# EAGLE board MicroMouse_Schematics_Final (EAGLE 8.6.0)
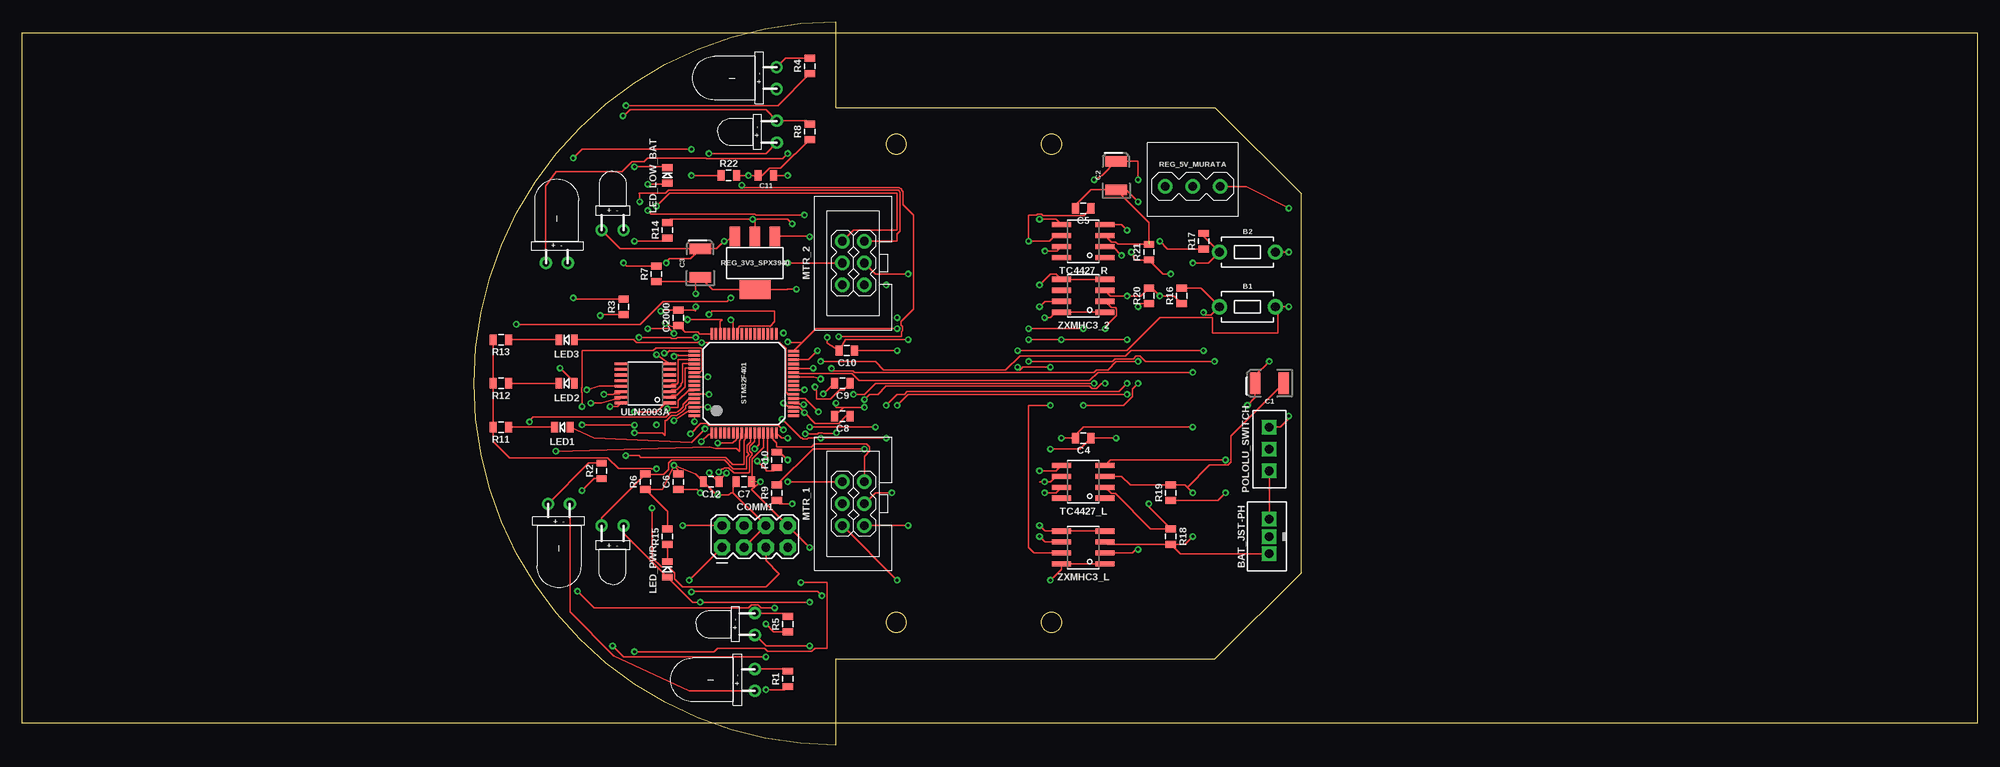
[diagram p0: board, top side]
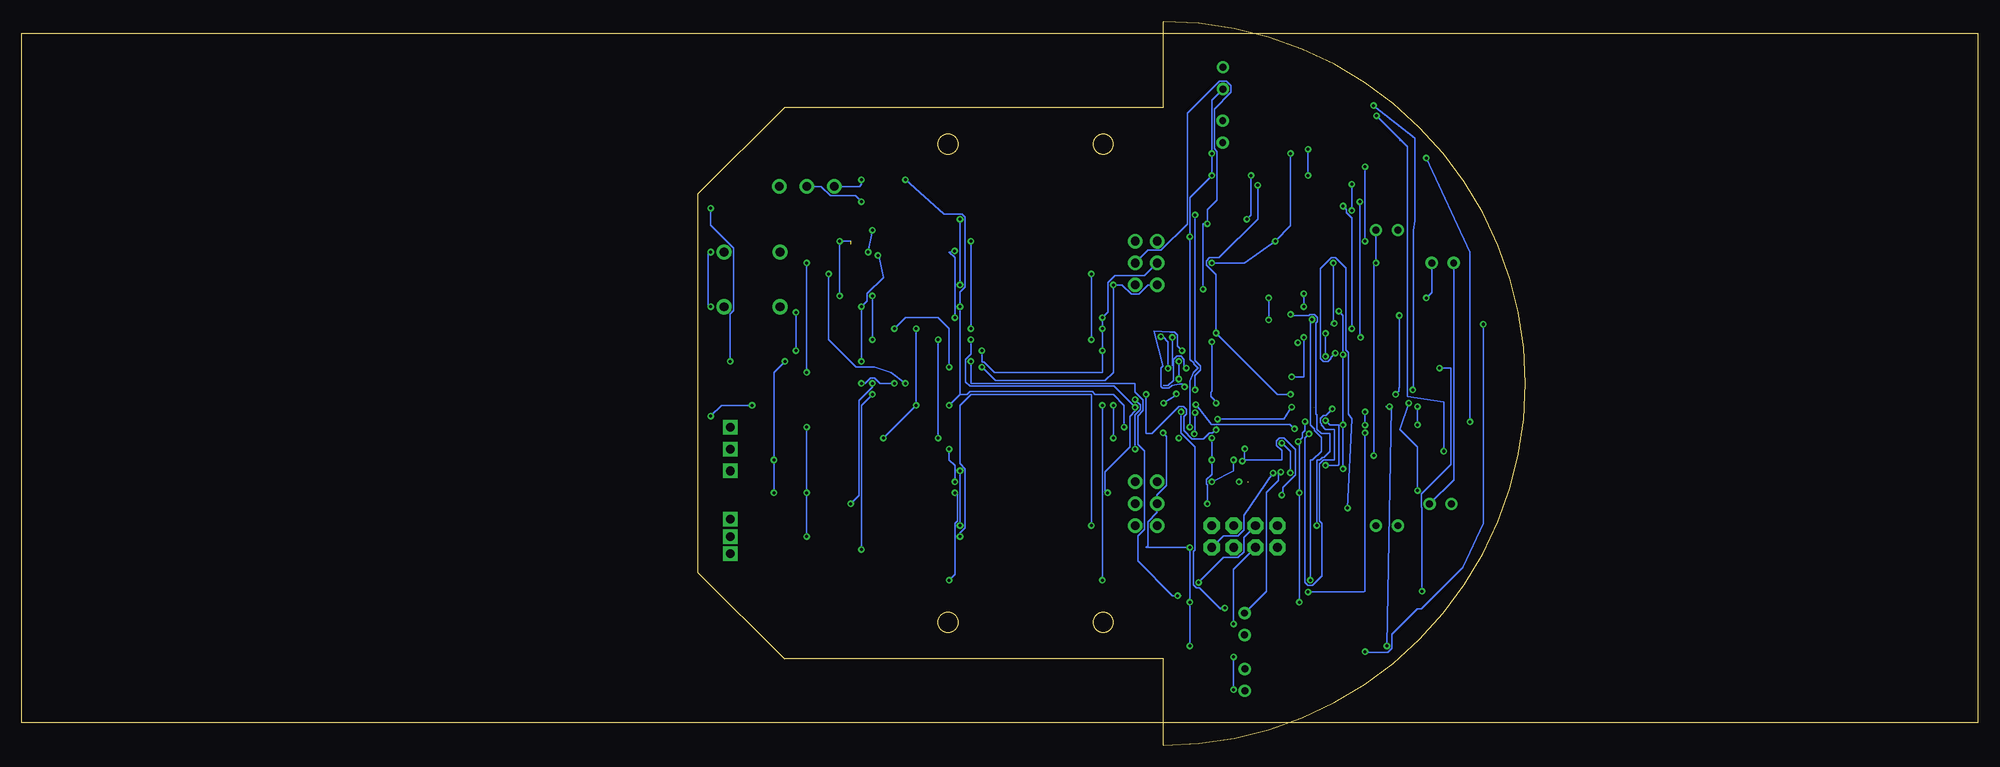
[diagram p1: board, bottom side, seen from below]

Size 227 x 80 mm. Coordinates in mm from the lower left corner, seen from the top.
Outline: 0,0 227,0 227,80 0,80 0,0
Copper layers (1*16): Top 0.035mm / dielectric 1.5mm / Bottom 0.035mm
Design rules "default": minimum track width 6mil, minimum drill 0.35mm, track to track 6mil, track to pad 6mil, pad to pad 6mil, via to via 6mil, smd to smd 6mil, copper to edge 40mil, drill to drill 6mil, minimum pad ring 10mil, minimum via ring 8mil, stop-mask expansion 4mil, vias tented up to drill 0mil, thermal gap 10mil

## Footprints (pad centres in the part's own frame; a part is rotated, then mirrored left to right if it is on the bottom)
POLOLU_BUTTON = drill 1 pad 1.778: P$1 -3.25,0; P$2 3.25,0
B3B-PH-K-S = drill 1 pad 1.676 square: BAT_+ 2,0; BAT_- -2,0; NC 0,0
EIA3528 = smd 1.2 x 2.5: A 1.65,0; C -1.65,0
0805 = smd 0.8 x 1.2: 1 -0.9,0; 2 0.9,0
2X4 = drill 1.016 pad 1.88 octagon: 1 -3.81,-1.27; 2 -3.81,1.27; 3 -1.27,-1.27; 4 -1.27,1.27; 5 1.27,-1.27; 6 1.27,1.27; 7 3.81,-1.27; 8 3.81,1.27
EMITTER = drill 0.8 pad 1.422: EM_+ -1.397,0.016; EM_- 1.143,0.016
LED-0805 = smd 0.8 x 1.2: A -0.9,0; C 0.9,0
MOTOR_ENCODER_HEADER = drill 1 pad 1.676: ENC_A 2.54,1.27; ENC_B 2.54,-1.27; ENC_GND 0,-1.27; ENC_VDD 0,1.27; MTR+ -2.54,1.27; MTR_- -2.54,-1.27
POLOLU_SWITCH = drill 1 pad 1.676 square: PIN1 -2.54,0; PIN2 0,0; PIN3 2.54,0
RECEIVER = drill 0.8 pad 1.422: RE_+ -1.27,0; RE_- 1.27,0
SOT223 = smd 1.219 x 2.235: GND 0,-3.099; IN -2.311,-3.099; OUT 2.311,-3.099 | smd 3.6 x 2.2: GND2 0,3.099
5V_REG_MURATA = drill 1 pad 1.676: GND 0,0; IN -3.175,0; OUT 3.175,0
LQFP64 = smd 0.3 x 1.3: BOOT0 -1.75,5.75; PA3 -3.75,-5.75; PA4 -2.25,-5.75; PA5 -1.75,-5.75; PA6 -1.25,-5.75; PA7 -0.75,-5.75; PA14 3.75,5.75; PA15 3.25,5.75; PB0 0.75,-5.75; PB1 1.25,-5.75; PB2 1.75,-5.75; PB3 0.75,5.75; PB4 0.25,5.75; PB5 -0.25,5.75; PB6 -0.75,5.75; PB7 -1.25,5.75; PB8 -2.25,5.75; PB9 -2.75,5.75; PB10 2.25,-5.75; PC4 -0.25,-5.75; PC5 0.25,-5.75; PC10 2.75,5.75; PC11 2.25,5.75; PC12 1.75,5.75; PD2 1.25,5.75; VCAP_1 2.75,-5.75; VDD_0 -2.75,-5.75; VDD_1 3.75,-5.75; VDD_3 -3.75,5.75; VSS_0 -3.25,-5.75; VSS_1 -3.25,5.75; VSS_2 3.25,-5.75 | smd 1.3 x 0.3: NRST -5.75,0.75; PA0_WKUP -5.75,-2.75; PA1 -5.75,-3.25; PA2 -5.75,-3.75; PA8 5.75,0.25; PA9 5.75,0.75; PA10 5.75,1.25; PA11 5.75,1.75; PA12 5.75,2.25; PA13 5.75,2.75; PB12 5.75,-3.75; PB13 5.75,-3.25; PB14 5.75,-2.75; PB15 5.75,-2.25; PC0 -5.75,0.25; PC1 -5.75,-0.25; PC2 -5.75,-0.75; PC3 -5.75,-1.25; PC6 5.75,-1.75; PC7 5.75,-1.25; PC8 5.75,-0.75; PC9 5.75,-0.25; PC13 -5.75,3.25; PC14 -5.75,2.75; PC15 -5.75,2.25; PH0 -5.75,1.75; PH1 -5.75,1.25; VBAT -5.75,3.75; VDD_2 5.75,3.75; VDDA -5.75,-2.25; VSS_3 5.75,3.25; VSSA -5.75,-1.75
TC4427_SOIC8 = smd 0.61 x 2.21: GND 0.635,-2.54; IN_A -0.635,-2.54; IN_B 1.905,-2.54; NC1 -1.905,-2.54; NC2 -1.905,2.54; OUT_A -0.635,2.54; OUT_B 1.905,2.54; VDD 0.635,2.54
ULN2003A = smd 1.55 x 0.3: 1B -2.8,2.275; 1C 2.8,2.275; 2B -2.8,1.625; 2C 2.8,1.625; 3B -2.8,0.975; 3C 2.8,0.975; 4B -2.8,0.325; 4C 2.8,0.325; 5B -2.8,-0.325; 5C 2.8,-0.325; 6B -2.8,-0.975; 6C 2.8,-0.975; 7B -2.8,-1.625; 7C 2.8,-1.625; COM 2.8,-2.275; GND -2.8,-2.275
ZXMHC3 = smd 0.61 x 2.21: N1D/P1D -0.635,-2.54; N1G -1.905,-2.54; N1S/N2S 0.635,-2.54; N2D/P2D 0.635,2.54; N2G 1.905,-2.54; P1G -1.905,2.54; P1S/P2S -0.635,2.54; P2G 1.905,2.54

## Placement (x,y rotation side)
B1  POLOLU_BUTTON  [POLOLU_BUTTON]  142.24,48.26 0 top
B2  POLOLU_BUTTON  [POLOLU_BUTTON]  142.24,54.61 0 top
BAT_JST-PH  3PIN  [B3B-PH-K-S]  144.78,21.59 90 top
C1  47uF  [EIA3528]  144.78,39.37 180 top
C2  47uF  [EIA3528]  127,63.5 90 top
C3  47uF  [EIA3528]  78.74,53.34 90 top
C4  1.0uF  [0805]  123.19,33.02 180 top
C5  1.0uF  [0805]  123.19,59.69 180 top
C6  0.1uF  [0805]  76.2,27.94 90 top
C7  0.1uF  [0805]  83.82,27.94 180 top
C8  0.1uF  [0805]  95.25,35.56 180 top
C9  2.2uF  [0805]  95.25,39.37 180 top
C10  0.1uF  [0805]  95.76,43.18 180 top
C11  10uF  [0805]  86.36,63.5 180 top
C12  0.1uF  [0805]  80.01,27.94 180 top
C2000  0.1uF  [0805]  76.2,46.99 90 top
COMM1  M04X2  [2X4]  85.09,21.59 0 top
E$1  [MOUSE_OUTLINE_2WHEEL]  110.49,39.37 90 top
EM_1  SFH4545  [EMITTER]  85.09,5.08 90 top
EM_2  SFH4545  [EMITTER]  62.23,25.4 180 top
EM_3  SFH4545  [EMITTER]  62.23,53.34 0 top
EM_4  SFH4545  [EMITTER]  87.63,74.93 90 top
LED1  LED  [LED-0805]  62.74,34.29 180 top
LED2  LED  [LED-0805]  63.25,39.37 180 top
LED3  LED  [LED-0805]  63.25,44.45 180 top
LED_LOW_BAT  LED  [LED-0805]  74.93,63.5 90 top
LED_PWR  LED  [LED-0805]  74.93,17.78 90 top
MTR_1  MOTOR_ENCODER_HEADER  [MOTOR_ENCODER_HEADER]  96.52,25.4 90 top
MTR_2  MOTOR_ENCODER_HEADER  [MOTOR_ENCODER_HEADER]  96.52,53.34 90 top
POLOLU_SWITCH  POLOLU_SWITCH  [POLOLU_SWITCH]  144.78,31.75 90 top
R1  16K  [0805]  88.9,5.08 90 top
R2  16K  [0805]  67.31,29.21 90 top
R3  16K  [0805]  69.85,48.26 90 top
R4  16K  [0805]  91.44,76.2 90 top
R5  1.8K  [0805]  88.9,11.43 90 top
R6  1.8K  [0805]  72.39,27.94 90 top
R7  1.8K  [0805]  73.66,52.07 90 top
R8  1.8K  [0805]  91.44,68.58 90 top
R9  30K  [0805]  87.63,26.67 90 top
R10  10K  [0805]  87.63,30.48 90 top
R11  1K  [0805]  55.63,34.29 180 top
R12  1K  [0805]  55.63,39.37 180 top
R13  1K  [0805]  55.63,44.45 180 top
R14  1K  [0805]  74.93,57.15 90 top
R15  1K  [0805]  74.93,21.59 90 top
R16  47K  [0805]  134.62,49.53 90 top
R17  47K  [0805]  137.16,55.88 90 top
R18  47K  [0805]  133.35,21.59 270 top
R19  47K  [0805]  133.35,26.67 90 top
R20  47K  [0805]  130.81,49.53 90 top
R21  47K  [0805]  130.81,54.61 90 top
R22  47K  [0805]  82.04,63.5 0 top
RE_LD  TEFT4300  [RECEIVER]  68.58,22.86 180 top
RE_LF  TEFT4300  [RECEIVER]  85.09,11.43 90 top
RE_RD  TEFT4300  [RECEIVER]  68.58,57.15 0 top
RE_RF  TEFT4300  [RECEIVER]  87.63,68.58 90 top
REG_3V3_SPX3940  3V3_REG  [SOT223]  85.09,53.34 180 top
REG_5V_MURATA  REG_5V_MURATA  [5V_REG_MURATA]  135.89,62.23 180 top
STM32F401  STM32F4_401_410_411_412_413_446  [LQFP64]  83.82,39.37 90 top
TC4427_L  TC4427_SOIC8  [TC4427_SOIC8]  123.19,27.94 90 top
TC4427_R  TC4427_SOIC8  [TC4427_SOIC8]  123.19,55.88 90 top
ULN2003A  ULN2003A  [ULN2003A]  72.39,39.37 180 top
ZXMHC3_2  ZXMHC3  [ZXMHC3]  123.19,49.53 90 top
ZXMHC3_L  ZXMHC3  [ZXMHC3]  123.19,20.32 90 top

## Library data of the parts
B1 B2 = POLOLU_BUTTON
BAT_JST-PH = BATT_JST-PH_3PIN
C1-C3 = SparkFun-Capacitors; PROD_ID: CAP-08310
C4-C10 C12 C2000 = CAP_CERAMIC_0805IN_2012MM
C11 = SparkFun-Capacitors; PROD_ID: CAP-11330
COMM1 = 2X4_PIN_HEADER
E$1 = MOUSE_OUTLINE_2WHEEL
EM_1-EM_4 = SFH4545
LED1-LED3 LED_LOW_BAT LED_PWR = LED_0805
MTR_1 MTR_2 = MOTOR_ENCODER_HEADER
POLOLU_SWITCH = POLOLU_SWITCH
R1-R22 = RESISTOR_0805IN_2012MM
RE_LD RE_LF RE_RD RE_RF = TEFT4300
REG_3V3_SPX3940 = REG_3V3_LM3940
REG_5V_MURATA = REG_5V_MURATA
STM32F401 = STM32F4_401_410_411_412_413_446
TC4427_L TC4427_R = TC4427
ULN2003A = ULN2003A
ZXMHC3_2 ZXMHC3_L = ZXMHC3

## Nets
+3V3: B1.P$2 B2.P$2 C3.A C6.1 C7.1 C8.1 C10.1 C2000.1 COMM1.8 LED_PWR.A MTR_1.ENC_VDD MTR_2.ENC_VDD RE_LD.RE_+ RE_LF.RE_+ RE_RD.RE_+ RE_RF.RE_+ REG_3V3_SPX3940.OUT STM32F401.VBAT STM32F401.VDD_0 STM32F401.VDD_1 STM32F401.VDD_2 STM32F401.VDD_3 STM32F401.VDDA
+5V: C2.A C11.1 EM_1.EM_+ EM_2.EM_+ EM_3.EM_+ EM_4.EM_+ REG_3V3_SPX3940.IN REG_5V_MURATA.OUT ZXMHC3_2.P1S/P2S ZXMHC3_L.P1S/P2S
B0: B1.P$1 R16.2 STM32F401.PB0
B1: B2.P$1 R17.2 STM32F401.PB1
EM_LD: STM32F401.PC12 ULN2003A.2B
EM_LF: STM32F401.PD2 ULN2003A.1B
EM_RD: STM32F401.PC11 ULN2003A.3B
EM_RF: STM32F401.PC10 ULN2003A.4B
GND: BAT_JST-PH.BAT_- C1.C C2.C C4.2 C5.2 C8.2 C9.2 MTR_1.ENC_GND R16.1 R17.1 R18.2 R19.2 R20.2 R21.2 REG_5V_MURATA.GND TC4427_L.GND TC4427_R.GND ZXMHC3_2.N1S/N2S ZXMHC3_L.N1S/N2S
LED1: LED1.A STM32F401.PA4
LED2: LED2.A STM32F401.PA5
LED3: LED3.A STM32F401.PA6
LED_LOW_BAT: LED_LOW_BAT.A STM32F401.PA7
LENC_A: MTR_1.ENC_A STM32F401.PA0_WKUP
LENC_B: MTR_1.ENC_B STM32F401.PA1
LMTR+: MTR_1.MTR+ ZXMHC3_L.N1D/P1D
LMTR-: MTR_1.MTR_- ZXMHC3_L.N2D/P2D
LPWM_A: R18.1 STM32F401.PB9 TC4427_L.IN_A
LPWM_B: R19.1 STM32F401.PB8 TC4427_L.IN_B
N$1: BAT_JST-PH.BAT_+ POLOLU_SWITCH.PIN1
N$3: C1.A POLOLU_SWITCH.PIN3 REG_5V_MURATA.IN
N$4: LED1.C R11.1
N$5: LED2.C R12.1
N$6: LED3.C R13.1
N$7: R1.1 ULN2003A.1C
N$8: LED_LOW_BAT.C R14.1
N$9: R2.1 ULN2003A.2C
N$10: LED_PWR.C R15.1
N$11: R3.1 ULN2003A.3C
N$12: TC4427_L.OUT_A ZXMHC3_L.N1G ZXMHC3_L.P1G
N$13: R4.1 ULN2003A.4C
N$14: EM_1.EM_- R1.2
N$15: TC4427_L.OUT_B ZXMHC3_L.N2G ZXMHC3_L.P2G
N$16: EM_2.EM_- R2.2
N$17: EM_3.EM_- R3.2
N$18: EM_4.EM_- R4.2
N$21: TC4427_R.OUT_A ZXMHC3_2.N1G ZXMHC3_2.P1G
N$25: TC4427_R.OUT_B ZXMHC3_2.N2G ZXMHC3_2.P2G
N$28: C9.1 STM32F401.VCAP_1
N$32: R22.1 STM32F401.BOOT0
NRST: C12.1 COMM1.7 STM32F401.NRST
RE_LD: R6.2 RE_LD.RE_- STM32F401.PC2
RE_LF: R5.2 RE_LF.RE_- STM32F401.PC3
RE_RD: R7.2 RE_RD.RE_- STM32F401.PC1
RE_RF: R8.2 RE_RF.RE_- STM32F401.PC0
RENC_A: MTR_2.ENC_A STM32F401.PA15
RENC_B: MTR_2.ENC_B STM32F401.PB3
RMRT-: ZXMHC3_2.N2D/P2D
RMTR+: MTR_2.MTR+ ZXMHC3_2.N1D/P1D
RMTR-: MTR_2.MTR_-
RPWM_A: R20.1 STM32F401.PB7 TC4427_R.IN_A
RPWM_B: R21.1 STM32F401.PB6 TC4427_R.IN_B
RX: COMM1.4 STM32F401.PA10
S$1: C3.C C6.2 C7.2 C10.2 C11.2 C12.2 C2000.2 COMM1.3 COMM1.6 MTR_2.ENC_GND R5.1 R6.1 R7.1 R8.1 R10.1 R11.2 R12.2 R13.2 R14.2 R15.2 R22.2 REG_3V3_SPX3940.GND REG_3V3_SPX3940.GND2 STM32F401.PB2 STM32F401.VSS_1 STM32F401.VSSA ULN2003A.GND
SWCLK: COMM1.5 STM32F401.PA14
SWDIO: COMM1.1 STM32F401.PA13
TX: COMM1.2 STM32F401.PA9
VBAT: C4.1 C5.1 R9.2 TC4427_L.VDD TC4427_R.VDD
VCAP_1: STM32F401.VSS_2
VCAP_2: STM32F401.VSS_3
VOLTMETER: R9.1 R10.2 STM32F401.PA2
VSS_0: STM32F401.VSS_0

## Tracks (layer width: path | path; a pad name or v marks a point on that pad's centre or on a via)
+3V3  (via drill 0.35)  (1 unrouted)
  Top 0.152: 147.33,48.26 v147.03,48.26 B1.P$2 145.8,47.95 145.8,45.21 138.18,45.21 138.18,46.99 132.08,46.99 128.27,43.18 v115.57,43.18 | v147.03,54.61 B2.P$2 | v90.84,35.98 92.08,34.73 94.84,34.73 95.67,35.56 C8.1 | v90.84,35.98 90.31,36.5 89.69,36.5 STM32F401.VDD_0 89.45,36.74 88.83,36.74 88.69,36.88 88.69,37.08 v88.39,37.08 | v91.44,20.32 COMM1.8 84.72,27.04 v85.74,27.94 84.76,27.98 84.76,30.61 86.07,31.91 STM32F401.VDDA | v91.44,8.89 86.36,8.89 RE_LF.RE_+ | v91.44,13.97 v78.74,13.97 77.84,13.97 LED_PWR.A 69.85,21.96 RE_LD.RE_+ | v78.74,26.67 78.37,27.04 C6.1 | C3.A 69.47,54.99 RE_RD.RE_+ | REG_3V3_SPX3940.OUT 82.55,56.21 v81.53,55.88 80.64,54.99 C3.A | MTR_2.ENC_VDD v88.9,53.34 | v78.07,34.93 STM32F401.VDD_3 | STM32F401.VBAT 79.89,33.46 79.73,33.46 v78.87,32.6 | v101.6,45.72 92.17,45.72 90.53,44.09 | 90.53,44.09 STM32F401.VDD_1 | v90.84,35.98 v90.83,35.98 | v90.92,33.52 92.35,33.52 92.46,33.63 92.96,33.63 93.06,33.53 94.44,33.53 v94.54,33.63 | RE_RF.RE_+ 86.36,66.04 v79.76,66.04 | STM32F401.VDD_2 78.67,45.12 78.48,45.31 76.98,45.31 76.39,45.91 | 76.39,45.91 C2000.1 | C3.A 77.6,53.85 75.18,53.85 74.79,53.45 v74.79,53.34 | v74.68,46.33 75.61,45.91 76.39,45.91 | C10.1 v101.6,43.18 | 90.53,44.09 89.01,44.09 v88.9,44.2
  Bottom 0.152: v147.03,48.26 147.32,48.55 147.32,54.61 v147.03,54.61 | v115.57,43.18 115.57,41.91 115.51,41.85 115.32,41.85 114.11,40.64 101.6,40.64 v101.6,43.18 v101.6,45.72 v101.6,46.99 100.94,47.65 100.94,51.05 100.12,51.87 96.72,51.87 MTR_2.ENC_VDD | v91.44,8.89 v91.44,13.97 v91.44,20.32 96.52,20.32 96.32,20.52 96.32,23.3 95.25,24.37 MTR_1.ENC_VDD 95.25,26.43 94.18,27.5 94.18,33.22 94.54,33.58 v94.54,33.63 | v78.74,13.97 v78.74,26.67 78.74,32.51 78.78,32.51 v78.87,32.6 78.38,33.1 78.38,33.62 78.07,33.93 v78.07,34.93 78.07,34.96 | v88.9,53.34 85.09,53.34 v81.53,55.88 79.76,57.66 v79.76,66.04 | v90.83,35.98 90.83,33.63 90.93,33.53 v90.92,33.52 | v74.79,53.34 74.79,46.34 74.68,46.23 75.08,46.23 v74.68,46.33 | v88.39,37.08 88.39,37.24 89,37.85 89,38.35 88.9,38.45 v88.9,44.2
+5V  (via drill 0.35)
  Top 0.152: ZXMHC3_L.P1S/P2S 117.47,19.68 116.84,20.32 116.84,36.83 v119.38,36.83 | v118.11,48.26 118.75,48.9 ZXMHC3_2.P1S/P2S | v124.46,62.99 125.35,63.5 C2.A 129.54,65.15 v129.54,62.99 | v99.06,34.29 v91.44,34.29 | EM_1.EM_+ 77.44,3.68 68.68,7.77 63.63,12.82 EM_2.EM_+ | v88.9,63.5 C11.1 | v91.44,56.39 91.39,56.44 REG_3V3_SPX3940.IN | EM_3.EM_+ 60.83,62.24 62.04,63.96 69.71,63.96 70.87,65.12 72.23,65.12 72.64,65.53 79.41,65.53 79.5,65.43 88.29,65.43 v88.9,66.04
  Bottom 0.152: 118.11,38.1 v119.38,36.83 | 118.11,38.1 v118.11,48.26 118.11,49.94 117.5,50.55 117.5,58.67 117.86,59.03 119.99,59.03 v124.46,62.99 | 118.11,38.1 117.27,38.1 116.97,38.41 102.74,38.41 102.44,38.1 100.33,38.1 99.06,36.83 v99.06,34.29 | EM_4.EM_+ 88.9,72.25 v88.9,66.04 v88.9,63.5 91.44,60.96 v91.44,56.39 91.44,42.16 90.99,41.71 90.99,41.6 90.53,41.15 91.04,40.64 91.44,39.62 v91.44,34.29 | EM_2.EM_+ 60.83,28.18 EM_3.EM_+ | REG_5V_MURATA.OUT 129.79,62.23 129.54,62.48 v129.54,62.99
B0  (via drill 0.35)
  Top 0.152: R16.2 136.82,50.43 B1.P$1 138.03,47.3 137.16,47.3 v137.16,47.6 | v137.16,43.18 128.7,43.18 128.09,42.57 115.82,42.57 114.19,40.95 100.03,40.95 99.06,41.91 v92.71,41.91 | v92.71,39.88 91.96,40.12 STM32F401.PB0
  Bottom 0.152: v137.16,47.6 v137.16,43.18 | v92.71,41.91 v92.71,39.88
B1  (via drill 0.35)
  Top 0.152: R17.2 137.16,56.44 B2.P$1 137.72,53.34 v135.89,53.34 | v135.89,40.64 124.87,40.64 123.91,39.67 97.17,39.67 96.34,40.5 89.69,40.5 STM32F401.PB1
  Bottom 0.152: v135.89,53.34 v135.89,40.64
EM_LD
  Top 0.152: ULN2003A.2B 75.46,38.02 76.06,38.02 77.01,38.97 77.01,41.15 78.04,41.15 STM32F401.PC12
EM_LF  (via drill 0.35)
  Top 0.152: STM32F401.PD2 78.74,40.62 78.74,40.67 78.95,40.88 78.95,43.37 78.81,43.5 74.68,43.5 73.61,43.5 73.3,43.18 65.02,43.18 65.02,38.91 64.98,38.86 64.98,38.36 65.02,38.31 v65.02,36.67 | ULN2003A.1B 75.12,37.02 74.66,37.02 73.7,36.07 v71.12,36.07 | v71.12,34.54 v65.03,34.54 v65.02,34.54
  Bottom 0.152: v71.12,36.07 v71.12,34.54 | v65.02,34.54 v65.02,36.67
EM_RD
  Top 0.152: STM32F401.PC11 78.03,41.66 76.71,41.66 76.71,39.53 76.5,39.32 76.5,39.1 76.06,38.67 75.46,38.67 ULN2003A.3B
EM_RF
  Top 0.152: ULN2003A.4B 75.46,39.32 76.06,39.32 76.19,39.45 76.19,42.16 76.2,42.16 76.24,42.12 STM32F401.PC10
GND  (via drill 0.35)  (1 unrouted)
  Top 0.152: ZXMHC3_L.N1S/N2S 126,20.69 R18.2 | R18.2 134.45,19.59 BAT_JST-PH.BAT_- | 135.25,27.3 134.99,27.57 R19.2 128.64,27.57 127.64,28.57 TC4427_L.GND | 135.25,27.3 v135.89,26.67 | v135.89,21.59 134.99,20.69 R18.2 | 135.25,27.3 137.82,29.87 139.95,29.87 140.31,30.23 140.31,33.25 C1.C | C4.2 121.92,33.02 | 121.92,33.02 v120.65,33.02 | v128.27,44.45 v120.65,44.45 v116.84,44.45 | ZXMHC3_2.N1S/N2S 126.36,49.53 v128.27,49.53 129.91,49.53 R20.2 131.18,50.43 v132.08,49.53 133.72,49.53 R16.1 | v132.08,55.88 132.98,54.98 R17.1 | C2.C 124.08,61.85 121.92,59.69 C5.2 | v135.89,34.29 123.19,34.29 121.92,33.02 | TC4427_R.GND 126.47,55.78 126.93,55.78 127.2,55.51 R21.2 130.81,58.04 C2.C | v97.79,36.58 95.37,36.58 | 95.37,36.58 C8.2 | v100.99,26.67 99.06,26.67 MTR_1.ENC_GND | v93.02,38.16 C9.2 | 95.37,36.58 94.5,36.58 v94.49,37.08 | v129.54,60.45 128.14,61.85 C2.C
  Bottom 0.152: v135.89,21.59 v135.89,26.67 v135.89,34.29 | v120.65,33.02 v120.65,44.45 | v128.27,44.45 v128.27,49.53 | v132.08,49.53 v132.08,55.88 130.81,55.88 | v116.84,44.45 116.84,42.77 117.45,42.16 117.45,39.55 116.97,39.06 100.22,39.06 98.04,36.89 97.85,36.89 97.79,36.83 v97.79,36.58 97.79,36.16 98.4,35.55 98.4,32 101.3,29.1 101.3,26.67 v100.99,26.67 | v94.49,37.08 93.02,38.04 v93.02,38.16 | REG_5V_MURATA.GND 134.22,62.23 133.16,61.16 130.25,61.16 v129.54,60.45
LED1  (via drill 0.35)
  Top 0.152: LED1.A 66.43,33.02 77.72,32.51 v79.3,34.08 | v90.76,36.91 90.4,36.91 90.31,37 89.69,37 STM32F401.PA4
  Bottom 0.152: v90.76,36.91 88.95,34.59 79.8,34.59 v79.3,34.08
LED2  (via drill 0.35)
  Top 0.152: v92.46,36.07 91.37,37.16 90.91,37.62 STM32F401.PA5 | v87.38,13.31 85.81,13.31 85.48,13.64 84.7,13.64 84.37,13.31 66.45,13.31 v64.52,15.24 | v62.48,41.15 64.15,39.49 LED2.A
  Bottom 0.152: v92.46,36.07 92.46,33.62 90.83,32 90.83,20.07 91.03,19.87 91.03,16 90.67,15.65 90.33,15.65 87.88,13.21 87.78,13.31 v87.38,13.31 | v64.52,15.24 64.52,24.94 64.57,25 64.57,26.52 61.14,29.95 61.14,41.15 v62.48,41.15
LED3  (via drill 0.35)
  Top 0.152: LED3.A 71.02,44.45 71.38,44.1 78.48,44.1 78.58,44.2 79.25,44.2 79.16,44.1 v78.92,44.1 87.97,44.1 88.69,43.39 88.69,38.38 88.9,38.17 88.9,38.1 89.55,38.1 STM32F401.PA6
LED_LOW_BAT  (via drill 0.35)
  Top 0.152: LED_LOW_BAT.A 74.81,62.48 v72.64,62.48 | v72.64,59.44 73.05,59.03 85.09,59.03 85.19,58.93 v90.83,58.93 90.93,58.93 | STM32F401.PA7 90.92,38.62 90.93,38.61 v90.83,38.61
  Bottom 0.152: v72.64,62.48 v72.64,59.44 | v90.83,58.93 90.83,42.01 90.23,41.4 90.23,40.9 90.83,40.29 v90.83,38.61
LENC_A  (via drill 0.35)
  Top 0.152: STM32F401.PA0_WKUP 86.57,30.69 v86.36,30.48 | v88.9,27.94 MTR_1.ENC_A
  Bottom 0.152: v86.36,30.48 86.36,29.21 v88.9,27.94
LENC_B
  Top 0.152: MTR_1.ENC_B 97.79,30.89 98.4,31.5 98.4,32 98.04,32.36 91.99,32.36 91.64,32.01 87.63,32.01 87.63,32.44 87.19,32.88 87.19,33.5 STM32F401.PA1
LMTR+  (via drill 0.35)
  Top 0.152: ZXMHC3_L.N1D/P1D 128.91,19.68 129.54,20.32 v129.54,20.08 | v128.27,38.1 102.87,38.1 v101.6,36.83 | v101.6,16.51 MTR_1.MTR+
  Bottom 0.152: v129.54,20.08 129.54,36.83 v128.27,38.1 | v101.6,36.83 v101.6,16.51
LMTR-  (via drill 0.35)
  Top 0.152: ZXMHC3_L.N2D/P2D 118.75,20.95 v118.11,21.59 | v102.87,22.86 MTR_1.MTR_-
  Bottom 0.152: v118.11,21.59 118.11,22 117.5,22.61 117.5,29.46 118.11,30.07 118.11,36.83 116.84,38.1 102.87,38.1 v102.87,22.86
LPWM_A  (via drill 0.35)
  Top 0.152: TC4427_L.IN_A 126.47,26.57 126.93,26.57 131.01,22.49 R18.1 130.81,25.03 v130.81,25.4 | v128.27,39.37 127.31,38.41 102.74,38.41 102.44,38.1 101.6,38.1 v100.33,36.83 | v100.33,33.02 v92.71,33.02 91.28,33.02 91.18,32.91 90.67,32.91 90.57,33.02 90.42,33.02 v88.22,35.23 | v79.63,36.62 STM32F401.PB9
  Bottom 0.152: v130.81,25.4 129.84,26.36 129.84,37.38 128.27,38.96 v128.27,39.37 | v100.33,36.83 v100.33,33.02 | v88.22,35.23 80.51,35.23 v79.63,36.62
LPWM_B  (via drill 0.35)  (1 unrouted)
  Top 0.152: R19.1 138.8,25.77 v139.7,26.67 | v139.7,30.48 126.36,30.48 TC4427_L.IN_B | v116.84,41.91 126.57,41.91 126.87,42.22 128.99,42.22 129.29,42.52 129.79,42.52 130.4,41.91 v138.43,41.91 | STM32F401.PB8 77.45,37.12 77.07,36.75 77.07,36.58 77.07,36.48 76.69,36.1 75.98,35.62 75.94,35.66 75.44,35.66 74.83,35.05 74.68,35.05 74.68,33.33 74.37,33.63 v71.12,33.63 | v92.86,14.73 92.36,15.24 77.72,15.24 v77.72,15.14
  Bottom 0.152: v139.7,26.67 v139.7,30.48 139.7,40.64 v138.43,41.91 | v116.84,41.91 116.84,39.37 97.79,39.37 97.79,38.35 96.88,37.44 96.88,36.21 97.48,35.6 97.48,32.3 96.72,31.54 96.72,22.42 97.48,21.66 97.48,18.75 93.47,14.73 v92.86,14.73 92.46,14.73 | v77.72,15.14 71.22,15.14 71.12,15.24 v71.12,33.63
N$1
  Top 0.152: POLOLU_SWITCH.PIN1 BAT_JST-PH.BAT_+
N$3  (via drill 0.35)
  Top 0.152: POLOLU_SWITCH.PIN3 146.05,34.29 147.32,35.56 v147.03,35.56 | v142.24,36.83 143.13,37.72 C1.A 143.13,40.26 v144.78,41.91 | REG_5V_MURATA.IN 142.11,62.23 v147.03,59.69 147.33,59.69
  Bottom 0.152: v147.03,35.56 145.76,36.83 v142.24,36.83 | v147.03,59.69 147.03,57.73 144.37,55.07 144.37,47.8 144.78,47.39 v144.78,41.91
N$4
  Top 0.152: R11.1 LED1.C
N$5
  Top 0.152: R12.1 LED2.C
N$6
  Top 0.152: LED3.C R13.1
N$7  (via drill 0.35)
  Top 0.152: R1.1 88.53,3.81 v86.36,3.81 | v86.36,7.62 69.85,7.62 v68.58,8.89 | v68.27,36.67 69.17,36.67 ULN2003A.1C
  Bottom 0.152: v86.36,3.81 v86.36,7.62 | v68.58,8.89 68.07,36.58 68.68,36.67 v68.27,36.67
N$8  (via drill 0.35)
  Top 0.152: R14.1 74.56,55.88 v71.12,55.88 | v71.12,64.52 74.81,64.52 LED_LOW_BAT.C
  Bottom 0.152: v71.12,55.88 v71.12,64.52
N$9  (via drill 0.35)
  Top 0.152: ULN2003A.2C 69.32,37.47 68.72,37.47 67.31,37.08 v66.04,37.08 | v65.02,26.92 66.41,28.31 R2.1
  Bottom 0.152: v66.04,37.08 67.06,34.04 65.02,32 v65.02,26.92
N$10
  Top 0.152: R15.1 LED_PWR.C
N$11  (via drill 0.35)
  Top 0.152: R3.1 67.17,47.36 67.06,47.24 v67.16,47.24 | v67.56,38.1 68.7,38.1 68.72,38.12 69.32,38.12 ULN2003A.3C
  Bottom 0.152: v67.16,47.24 67.16,38.91 67.21,38.86 67.21,38.46 v67.56,38.1
N$12  (via drill 0.35)
  Top 0.152: ZXMHC3_L.N1G ZXMHC3_L.P1G 120.65,17.78 v119.38,16.51 | v118.72,26.67 120.02,26.67 TC4427_L.OUT_A
  Bottom 0.152: v119.38,16.51 118.72,17.17 118.72,23.11 118.42,23.41 118.42,26.67 v118.72,26.67
N$13  (via drill 0.35)
  Top 0.152: R4.1 87.77,71.63 70.1,71.63 v70.12,71.61 | v65.58,38.61 67.04,39.05 ULN2003A.4C
  Bottom 0.152: v70.12,71.61 65.35,67.86 65.35,58.28 65.53,57.09 65.53,38.61 v65.58,38.61
N$14
  Top 0.152: R1.2 88.66,6.22 EM_1.EM_-
N$15  (via drill 0.35)
  Top 0.152: ZXMHC3_L.N2G ZXMHC3_L.P2G 118.75,22.23 v118.11,22.86 | v118.11,29.21 120.02,29.21 TC4427_L.OUT_B
  Bottom 0.152: v118.11,22.86 v118.11,29.21
N$16
  Top 0.152: R2.2 65.81,30.11 EM_2.EM_-
N$17  (via drill 0.35)
  Top 0.152: v64.01,49.28 64.12,49.16 R3.2
  Bottom 0.152: EM_3.EM_- 63.37,49.91 v64.01,49.28
N$18
  Top 0.152: R4.2 88.64,77.1 EM_4.EM_-
N$21  (via drill 0.35)
  Top 0.152: ZXMHC3_2.N1G ZXMHC3_2.P1G 120.02,47.62 119.38,46.99 v118.72,46.99 | v118.74,54.74 120.14,54.74 TC4427_R.OUT_A
  Bottom 0.152: v118.72,46.99 118.72,53.95 119.38,54.61 v118.74,54.74
N$25  (via drill 0.35)
  Top 0.152: TC4427_R.OUT_B 120.02,58.42 v118.11,58.42 | v118.11,50.8 119.38,52.07 120.02,52.07 ZXMHC3_2.P2G ZXMHC3_2.N2G
  Bottom 0.152: v118.11,58.42 v118.11,50.8
N$28  (via drill 0.35)
  Top 0.152: STM32F401.VCAP_1 91.3,42.12 v92.36,43.18 | C9.1 95.5,38.72 95.5,38.61 94.91,38.61 93.85,37.55 92.26,37.55 92.22,38.61 91.95,38.61 91.95,38.87 v92.05,38.97
  Bottom 0.152: v92.05,38.97 92.35,39.27 92.67,39.27 93.54,39.13 93.85,38.81 94.61,38.81 94.79,38.99 94.79,41.15 94.59,41.36 95.6,45.46 93.72,45.31 93.22,45.31 92.86,44.95 92.86,43.69 v92.36,43.18
N$32  (via drill 0.35)
  Top 0.152: R22.1 v77.72,63.5 | v77.72,66.55 65.02,66.55 v64.01,65.53 | v58.93,34.9 58.93,35.05 59.34,35.46 74.17,35.46 74.81,35.46 75.31,35.96 75.95,35.96 76.17,36.11 76.49,36.33 76.77,36.61 76.77,36.94 77.33,37.5 77.95,37.5 STM32F401.BOOT0
  Bottom 0.152: v77.72,63.5 v77.72,66.55 | v58.93,34.9 58.93,54.64 v64.01,65.53
NRST  (via drill 0.35)
  Top 0.152: STM32F401.NRST 82.95,33.5 82.95,32.88 82.51,32.44 v80.77,32.44 | v79.8,29 80.86,27.94 C12.1 80.91,28.08 v81.79,28.96
  Bottom 0.152: COMM1.7 87.53,21.69 85.88,21.69 85.19,22.38 85.19,24.03 v81.79,28.96 | v80.77,32.44 79.8,31.47 v79.8,29
RE_LD
  Top 0.152: RE_LD.RE_- 67.31,23.76 72.32,28.77 | 72.32,28.77 R6.2 | STM32F401.PC2 84.57,32.56 84.16,32.15 84.16,31.39 84.42,31.13 84.15,30.86 84.15,29.46 82.57,29.46 81.57,30.46 75.44,30.46 75.08,30.11 75.08,29.36 74.49,28.77 72.32,28.77
RE_LF  (via drill 0.35)
  Top 0.152: R5.2 88.53,12.7 RE_LF.RE_- | STM32F401.PC3 85.07,32.63 84.46,32.02 84.46,31.52 84.77,31.21 84.77,31.05 84.46,30.73 84.46,29.08 84.33,28.96 82.65,28.96 82.04,29.56 81.54,29.56 81.44,29.46 81.27,29.46 v80.88,29.07
  Bottom 0.152: RE_LF.RE_- 82.55,15.24 82.55,24.89 82.55,25.4 82.55,26.72 81.18,28.09 81.18,28.77 v80.88,29.07
RE_RD  (via drill 0.35)
  Top 0.152: v69.85,53.34 70.22,52.97 R7.2 | STM32F401.PC1 83.95,33.5 83.95,32.88 83.82,32.75 83.82,29.97 82.49,29.97 81.7,30.77 71.85,30.77 71.63,30.99 v70.1,30.99
  Bottom 0.152: RE_RD.RE_- v69.85,53.34 70.1,53.09 v70.1,30.99
RE_RF  (via drill 0.35)
  Top 0.152: R8.2 91.07,69.85 RE_RF.RE_- 86.36,71.12 70.61,71.12 70.1,70.61 69.98,70.61 v69.79,70.42 | STM32F401.PC0 83.45,33.5 83.45,32.88 83.31,32.74 83.31,31.5 82.97,31.83 80.52,31.83 79.84,32 v61.98,31.5
  Bottom 0.152: v69.79,70.42 67.06,67.69 | 67.06,67.69 67.06,67.56 | 67.06,67.69 66.19,66.83 66.19,37.85 61.98,37.19 v61.98,31.5
RENC_A  (via drill 0.35)
  Top 0.152: MTR_2.ENC_A 96.52,57.15 101.6,57.15 101.6,57.91 101.6,58.42 101.6,61.47 75.18,61.47 v73.66,59.94 | STM32F401.PA15 76.25,42.62 76.2,42.67 75.85,42.67 v75.69,42.51 | v75.69,45.16 75.13,45.72 v72.64,45.72
  Bottom 0.152: v75.69,42.51 v75.69,45.16 75.69,45.21 | v73.66,59.94 73.25,59.53 73.25,59.19 72.64,58.58 v72.64,45.72
RENC_B  (via drill 0.35)
  Top 0.152: MTR_2.ENC_B 101.6,55.88 101.6,56.72 101.91,57.02 101.91,61.59 101.73,61.77 75.06,61.77 74.75,61.47 71.63,61.47 71.73,61.37 v71.73,60.45 | 79.25,40.13 79.24,40.12 v79.63,40.12 STM32F401.PB3 | v78.23,44.7 76.09,44.7 75.94,44.55 75.44,44.55 75.29,44.7 v71.63,44.7
  Bottom 0.152: v78.23,44.7 78.23,40.13 78.24,40.12 v79.63,40.12 | v71.73,60.45 71.73,44.8 v71.63,44.7
RMTR+  (via drill 0.35)
  Top 0.152: ZXMHC3_2.N1D/P1D 126.47,48.16 126.93,48.16 127.06,48.02 127.06,47.23 125.73,45.89 v125.73,45.72 | v119.38,41.25 116.18,41.25 115.88,40.95 115.57,40.95 v115.57,41.25
  Bottom 0.152: v125.73,45.72 124.46,46.99 120.65,46.99 119.38,45.72 v119.38,41.25 | v115.57,41.25 114,39.67 101.3,39.67 100.33,40.64 v100.33,50.8 99.3,50.8 98.23,49.73 97.35,49.73 96.28,50.8 MTR_2.MTR+
RPWM_A  (via drill 0.35)
  Top 0.152: R20.1 129.91,48.63 v129.54,48.26 | v127.64,54.23 126.62,55.24 TC4427_R.IN_A | v129.54,41.91 127,41.91 126.03,40.95 124.75,40.95 124.44,40.64 96.63,40.64 96.47,40.8 93.98,40.8 v93.98,41.1 | v94.81,44.79 102.11,44.79 102.11,45.37 102.21,45.47 102.21,45.97 102.03,46.15 102.03,46.56 103.48,48.01 103.48,58.93 102.28,60.12 102.28,61.65 102.11,61.82 102.11,61.98 101.95,61.98 101.85,62.08 83.87,62.08 v83.57,62.38 | STM32F401.PB7 79.23,38.12 v79.76,38.1
  Bottom 0.152: v127.64,54.23 127.51,54.1 127,51.66 128.88,49.78 128.88,48.92 v129.54,48.26 v129.54,41.91 | 93.98,41.91 v93.98,41.1 93.98,44.2 94.57,44.79 v94.81,44.79 | v79.76,38.1 81.28,38.1 v88.39,45.21 88.39,51.97 89.51,53.09 89.51,53.59 89.15,53.95 88.05,53.95 83.57,58.42 v83.57,62.38
RPWM_B  (via drill 0.35)
  Top 0.152: v128.78,54.61 129.17,53.71 R21.1 132.45,52.07 v133.35,52.07 | v128.27,57.15 127.64,57.78 TC4427_R.IN_B | v124.46,39.37 99.06,39.37 97.79,38.1 v96.52,38.1 | 80.26,34.54 80.31,34.5 | v88.39,33.98 88.33,33.98 87.81,34.5 80.31,34.5 | STM32F401.PB6 77.95,38.5 77.33,38.5 76.2,37.37 76.2,36.58 75.07,36.58 v74.91,36.41 | 80.31,34.5 79.74,34.5 79.55,34.69 78.8,34.69 v77.62,33.52
  Bottom 0.152: v128.78,54.61 v128.27,57.15 | v133.35,52.07 133.35,44.45 130.15,41.25 128.02,41.25 126.14,40.64 v124.46,39.37 | v96.52,38.1 96.52,33.53 95.85,33.53 92.71,36.67 92.2,36.67 91.85,36.32 91.85,35.82 92.15,35.52 92.15,33.89 91.18,32.91 89.86,32.91 89.15,33.63 88.8,33.63 88.39,34.04 v88.39,33.98 | v74.91,36.41 75.66,35.66 75.94,35.66 76.3,35.3 76.3,34.8 76.2,34.7 76.2,34.54 75.69,34.04 74.68,34.04 74.68,30.48 74.69,30.46 75.94,30.46 76.4,30 76.4,23.41 76.1,23.11 76.1,17.02 77.22,15.9 77.72,15.9 78.08,16.26 78.08,33.02 77.68,33.41 77.68,33.57 v77.62,33.52
RX  (via drill 0.35)
  Top 0.152: STM32F401.PA10 82.57,46.46 v82.3,46.74 | v82.3,49.28 81.89,48.87 74.42,48.87 71.79,46.23 v57.4,46.23 | v71.12,8.23 80.36,8.23 80.77,8.64 86.18,8.64 86.54,8.28 91.69,8.28 92.04,8.64 93.47,8.64 93.47,16.26 v90.42,16.26
  Bottom 0.152: v82.3,46.74 v82.3,49.28 | v57.4,46.23 57.4,23.09 59.77,18.02 64.58,13.21 65.02,13.21 67.97,10.26 67.97,8.64 68.48,8.13 71.02,8.13 v71.12,8.23 | COMM1.4 85.19,21.49 85.19,19.84 85.88,19.15 87.53,19.15 v90.42,16.26
S$1  (via drill 0.35)
  Top 0.152: MTR_2.ENC_GND 99.06,52.07 v102.87,52.07 | v102.87,44.45 95.62,44.45 C10.2 93.47,44.06 v93.47,44.7 | R8.1 88.09,64.33 86.77,64.33 85.94,63.5 C11.2 v84.33,63.5 R22.2 | STM32F401.VSSA 85.57,32.27 v85.07,31.77 | R10.1 87.26,29.21 86.36,29.21 86.36,29.36 v85.37,30.35 | R14.2 75.3,58.42 v84.84,58.42 | R5.1 87.26,10.53 v86.36,11.43 | v84.84,58.42 85.09,58.42 REG_3V3_SPX3940.GND | COMM1.3 COMM1.6 82.55,26.67 | C7.2 82.55,27.57 82.55,26.67 | R7.1 78.22,51.17 78.23,51.18 | 82.55,26.67 82.3,26.67 82.04,26.42 v80.77,26.42 80.63,26.42 C12.2 | R15.2 74.93,24.5 R6.1 74.4,27.04 v75.69,29.86 | C12.2 80.38,26.67 | v73.67,42.69 ULN2003A.GND | C12.2 78.21,28.84 v75.69,29.86 | STM32F401.VSS_1 77.27,36.12 v75.69,35.05 | R13.2 R12.2 R11.2 54.73,32.65 56.64,30.74 68,30.74 69.28,29.47 73.08,29.47 73.09,29.46 v73.66,29.46 | STM32F401.PB2 91.82,41.12 v91.85,41.15 | v74.17,47.75 74.31,47.89 C2000.2 78.09,47.89 78.23,47.75 v78.23,48.26 | v78.23,49.78 78.23,51.18 | 78.23,51.18 C3.C 80.19,50.24 REG_3V3_SPX3940.GND2 88.85,50.24 88.9,50.29 v89.92,50.29 | v89.41,57.91 88.9,58.42 v84.84,58.42 | C6.2 76.2,29.35 v75.69,29.86
  Bottom 0.152: v102.87,52.07 v102.87,44.45 | 94.49,39.12 93.98,39.12 93.37,39.72 93.37,41.36 | v93.47,44.7 93.47,41.46 93.37,41.36 | v84.33,63.5 84.33,58.93 v84.84,58.42 | v85.07,31.77 85.09,31.75 85.09,30.63 v85.37,30.35 85.24,30.48 80.77,30.48 80.77,31.58 81.38,32.19 81.38,32.69 81.02,33.05 80.52,33.05 79.19,31.72 79.19,28.75 80.64,27.3 80.64,26.55 v80.77,26.42 | v86.36,11.43 86.36,17.78 COMM1.3 | v73.66,34.54 73.66,41.66 73.68,41.68 v73.67,42.69 73.67,47.25 v74.17,47.75 | v78.23,48.26 v78.23,49.78 | 93.37,41.36 93.32,41.41 93.32,42.16 92.96,42.52 92.46,42.52 92.1,42.16 92.1,40.89 v91.85,41.15 | v89.92,50.29 89.92,57.91 v89.41,57.91 89.41,59.55 88.29,60.66 88.29,66.29 88.59,66.59 88.59,71.22 86.67,73.14 86.67,73.92 87.22,74.47 88,74.47 91.75,70.73 91.75,57.88 94.81,54.81 96.32,54.81 MTR_2.ENC_GND | 74.17,34.54 74.17,29.97 74.28,29.86 v75.69,29.86 | 74.17,34.54 v73.66,34.54 | 74.17,34.54 75.18,34.54 v75.69,35.05 | v73.66,34.54 v73.66,29.46
SWCLK  (via drill 0.35)
  Top 0.152: STM32F401.PA14 75.24,43.12 75.18,43.18 74.9,42.89 v74.58,42.89 | COMM1.5 86.36,18.8 87.88,17.27 86.36,15.75 76.71,15.75 75.76,16.7 75.76,17.38 75.08,18.05 74.23,18.05 73.15,19.14 v73.15,24.89
  Bottom 0.152: v73.15,24.89 72.64,35.21 73.05,35.82 73.05,42.94 73.36,43.24 73.36,52.77 74.54,53.95 75.04,53.95 76.3,52.69 76.3,42.26 75.94,41.91 75.44,41.91 75.08,42.26 75.08,42.38 v74.58,42.89
SWDIO  (via drill 0.35)
  Top 0.152: COMM1.1 v77.47,16.51 | v77.26,46.78 81.24,46.78 81.28,46.74 81.07,46.53 STM32F401.PA13
  Bottom 0.152: v77.47,16.51 77.47,30.48 77.22,30.48 76.2,31.5 76.2,33.1 77.01,33.91 77.01,34.09 77.47,34.54 77.47,34.67 77.46,34.68 77.46,46.49 77.22,46.74 v77.26,46.78
TX  (via drill 0.35)
  Top 0.152: COMM1.2 v76.71,22.86 | STM32F401.PA9 83.19,45.24 83.19,45.87 83.33,46 86.81,46 86.82,45.99 87.38,46.55 87.38,47.75 80.12,47.75 v79.76,47.39
  Bottom 0.152: v76.71,22.86 76.71,30.48 76.36,30.48 76.07,30.77 75.91,30.77 75.18,31.5 75.18,33.53 76.2,33.53 76.71,34.04 76.71,35.72 76.81,35.82 76.81,46.38 76.65,46.53 76.65,47.03 77.01,47.39 77.51,47.39 77.66,47.24 79.76,47.24 v79.76,47.39
VBAT  (via drill 0.35)
  Top 0.152: TC4427_L.VDD 120.02,28.57 119.38,27.94 v118.72,27.94 118.11,27.94 | v119.38,31.75 122.82,31.75 C4.1 v127,33.02 | v123.19,45.72 v116.84,45.72 | TC4427_R.VDD 119.89,56.52 119.25,55.88 v116.84,55.88 116.84,58.93 117.76,58.93 117.86,59.03 118.36,59.03 118.53,58.86 123.26,58.86 C5.1 | v129.54,39.37 128.88,38.71 128.88,37.85 127.86,36.83 v123.19,36.83 | v125.73,39.37 125.32,39.37 124.71,38.76 124.21,38.76 123.91,39.06 100.33,39.06 99.36,38.1 98.4,38.1 v97.79,37.49 | v97.79,31.75 91.81,31.75 R9.2
  Bottom 0.152: v118.72,27.94 118.72,29.82 119.38,30.48 v119.38,31.75 | v127,33.02 124.97,35.05 | 124.97,35.05 v123.19,36.83 v123.19,45.72 | v116.84,45.72 v116.84,55.88 | v129.54,39.37 129.13,39.37 128.52,39.98 128.02,39.98 127.41,39.37 v125.73,39.37 | v97.79,37.49 97.79,37.44 97.18,36.84 97.18,36.33 97.79,35.73 v97.79,31.75 | 124.97,35.05
VOLTMETER  (via drill 0.35)
  Top 0.152: STM32F401.PA2 88.17,33.02 v88.9,33.02 | v88.9,30.48 88,31.38 R10.2 | v89.41,25.4 88,25.4 R9.1
  Bottom 0.152: v88.9,33.02 v88.9,30.48 88.9,28.8 89.51,28.19 89.51,27.69 89.41,27.59 v89.41,25.4